# Allegro board MK60_88E6071_TEST_V10A.brd
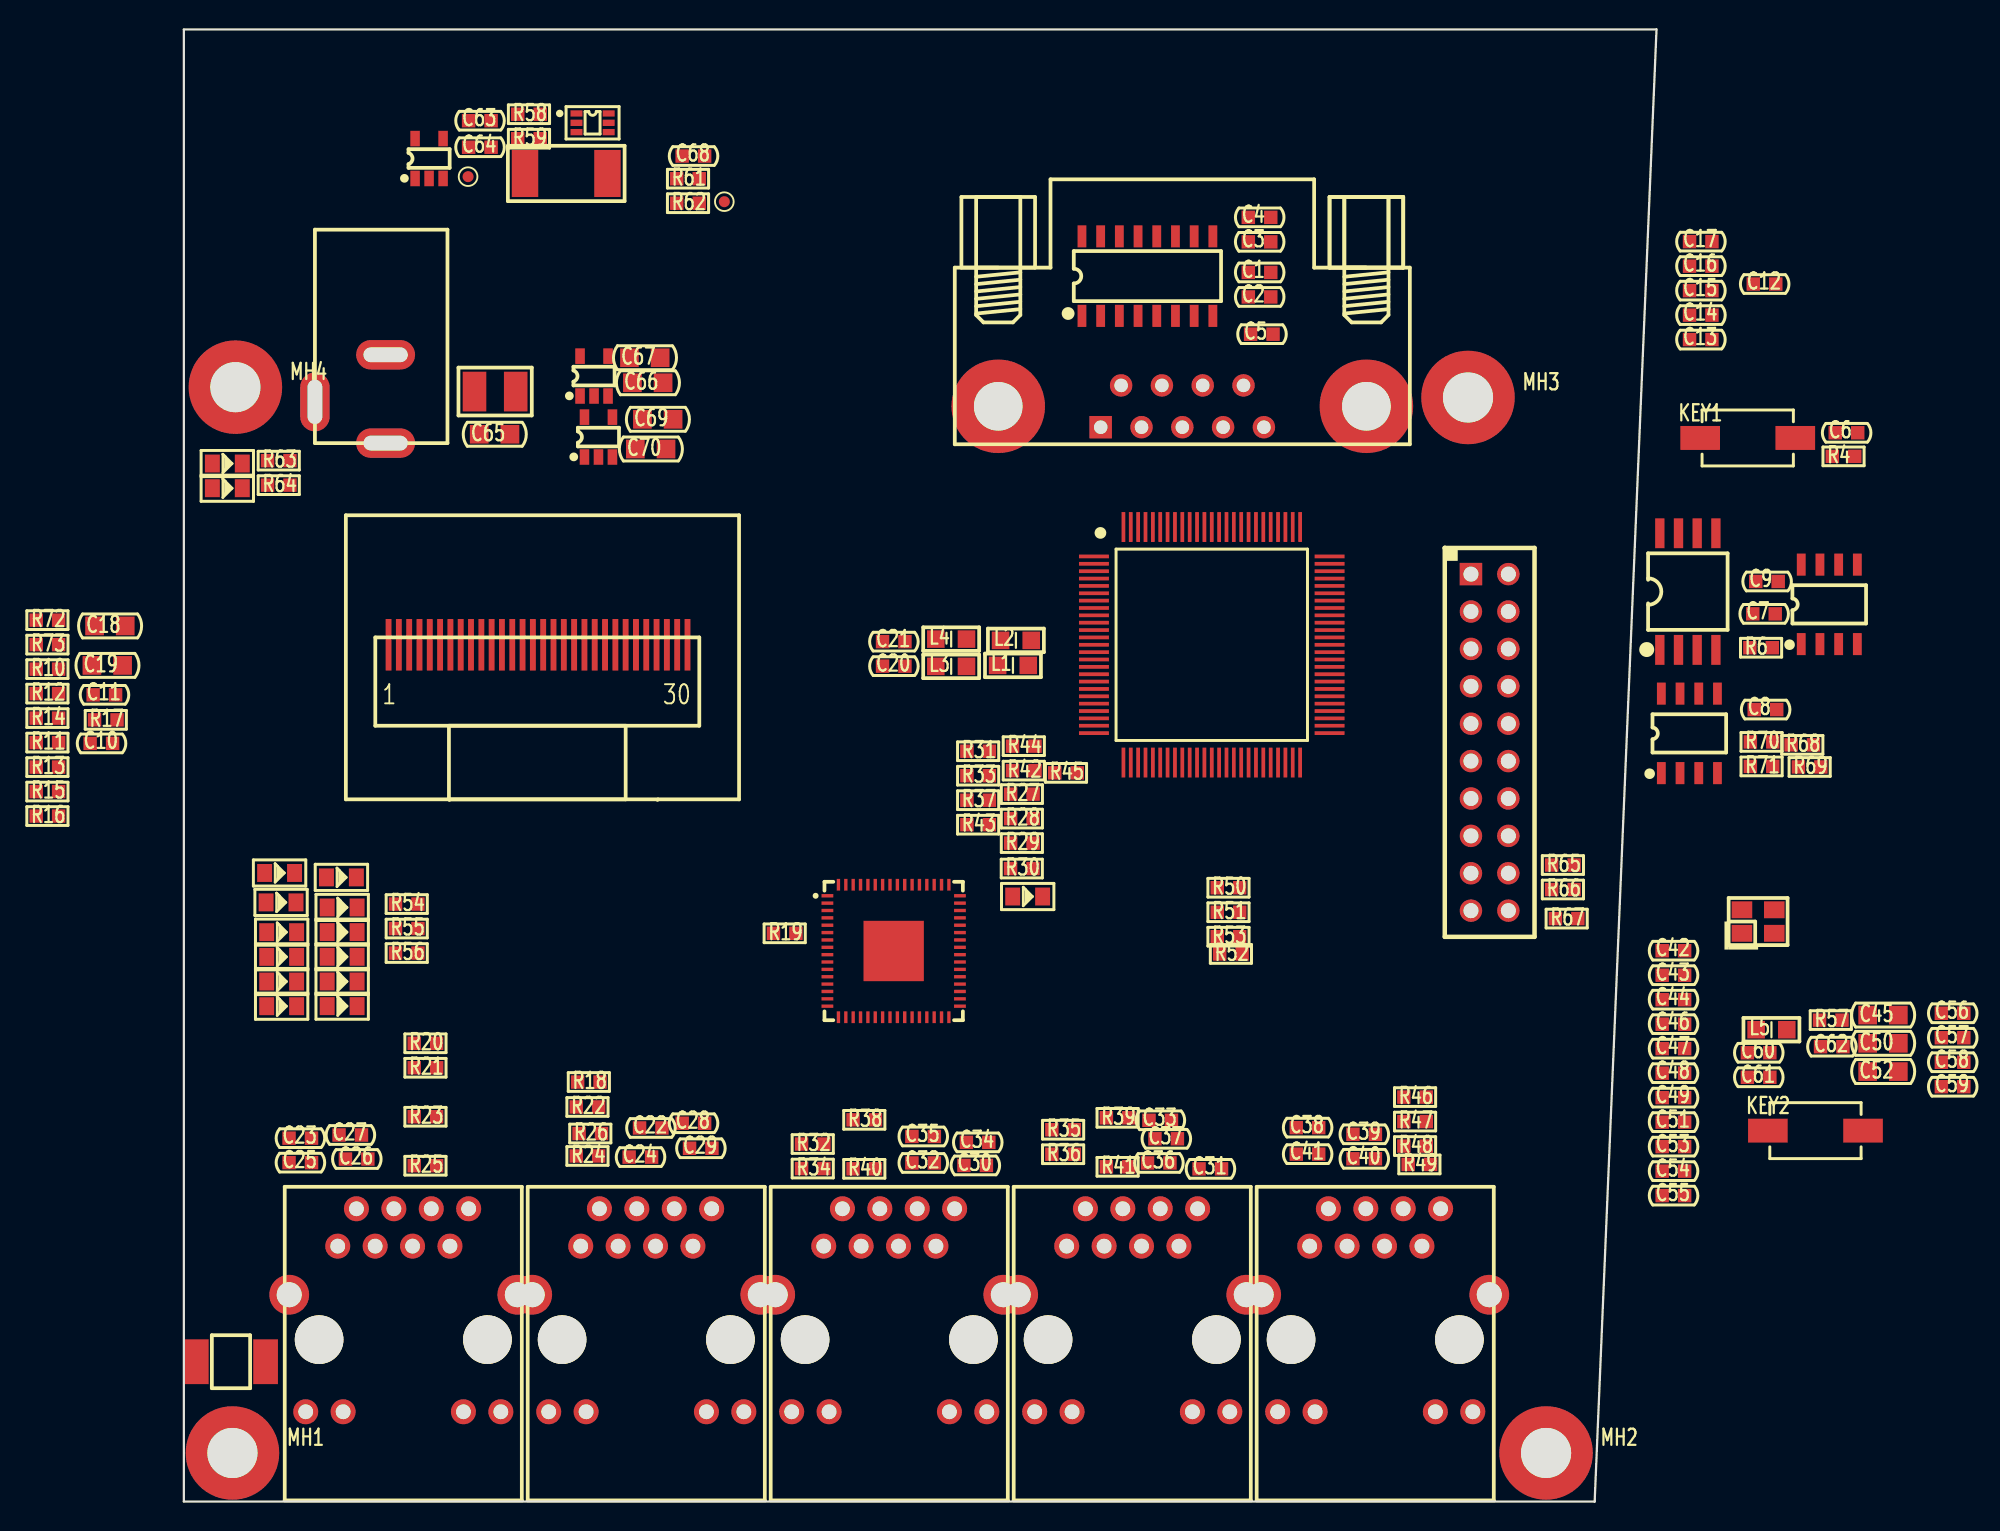
[diagram p0: board, top side]
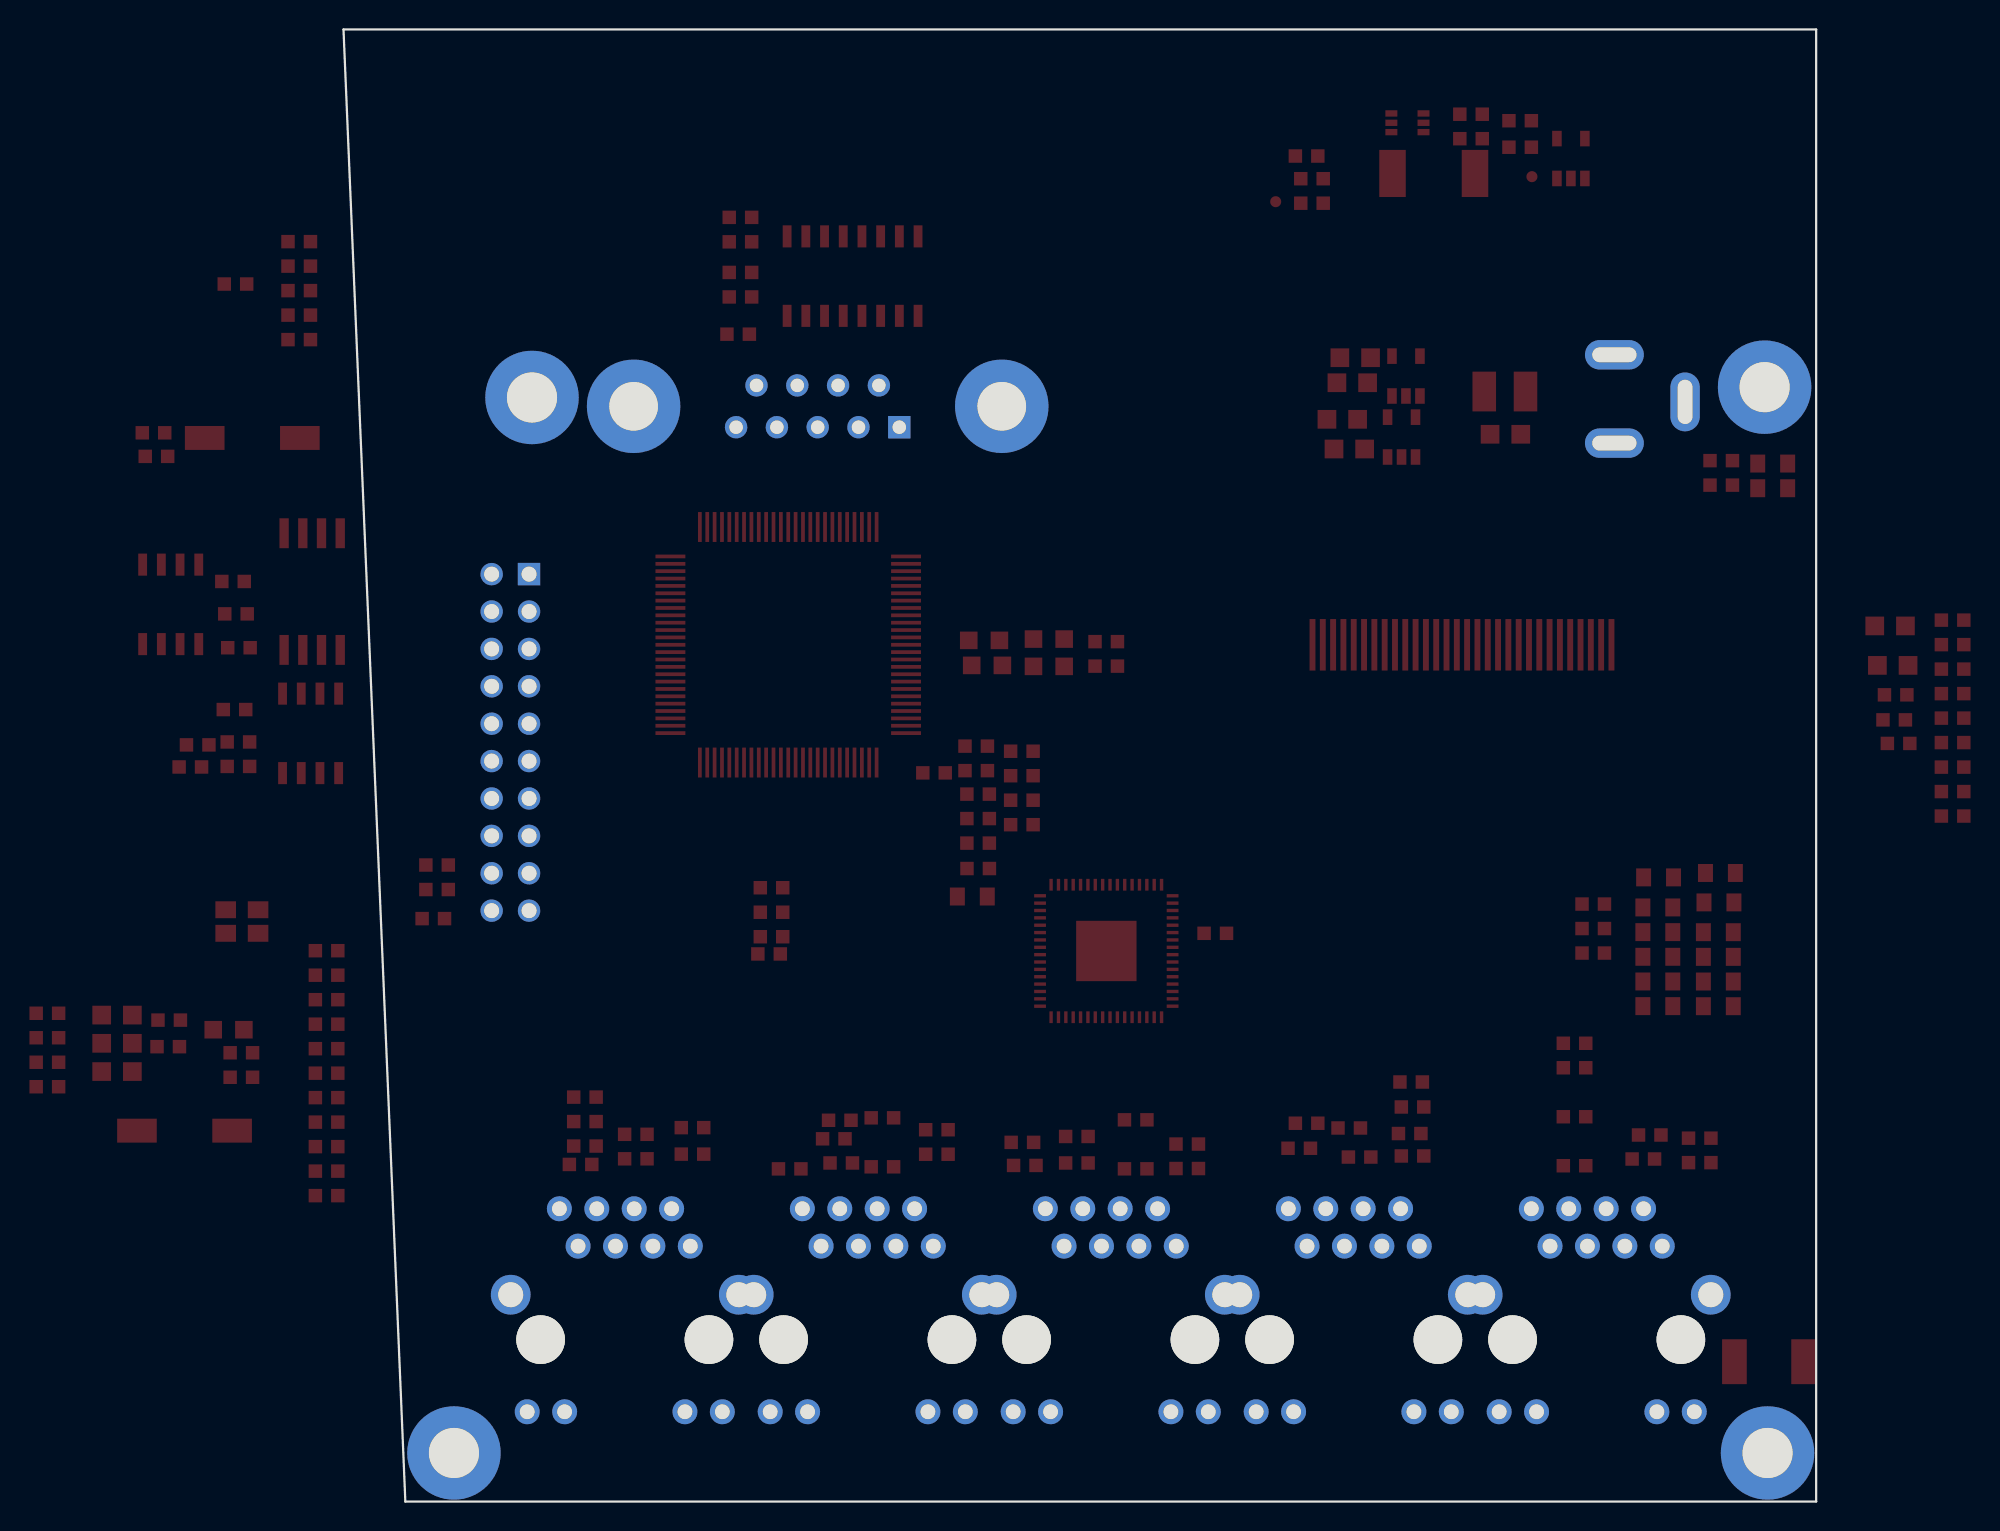
[diagram p1: board, bottom side, seen from below]

Outline 100 x 100 mm; copper layers: TOP, BOTTOM. Coordinates in mm from the lower left corner of the outline.
Outline path: 0,100 0,0 95.8,0 100,100 0,100

## Design rules (mm)
net group DP5: nets RXN0 RXN4
net group DP11: nets TXP0 TXP4
net group DP12: nets RXP0 RXP4

## Placement (name value [footprint] x y rotation side)
C1  0.1uF_50V  [CC0603]  73.04 83.49 0 top
C2  0.1uF_50V  [CC0603]  73.04 81.83 0 top
C3  0.1uF_50V  [CC0603]  73.04 85.57 0 top
C4  0.1uF_50V  [CC0603]  73.04 87.24 0 top
C5  0.1uF_50V  [CC0603]  73.2 79.3 0 top
C6  0.1uF_50V  [CC0603]  112.9 72.6 0 top
C7  0.1uF_50V  [CC0603]  107.3 60.3 0 top
C8  0.1uF_50V  [CC0603]  107.4 53.8 0 top
C9  0.1uF_50V  [CC0603]  107.5 62.5 0 top
C10  1uF_50V  [CC0603]  -5.6 51.5 0 top
C11  1uF_50V  [CC0603]  -5.4 54.8 0 top
C12  0.1uF_50V  [CC0603]  107.33 82.71 0 top
C13  0.1uF_50V  [CC0603]  103.01 78.93 0 top
C14  0.1uF_50V  [CC0603]  103.01 80.59 0 top
C15  0.1uF_50V  [CC0603]  103.01 82.26 0 top
C16  0.1uF_50V  [CC0603]  103.01 83.92 0 top
C17  0.1uF_50V  [CC0603]  103.01 85.59 0 top
C18  10uF_25V  [CC0805]  -5.02 59.48 0 top
C19  10uF_25V  [CC0805]  -5.2 56.8 0 top
C20  0.1uF_50V  [CC0603]  48.21 56.75 0 top
C21  0.1uF_50V  [CC0603]  48.21 58.41 0 top
C22  0.1uF_50V  [CC0603]  31.71 25.38 0 top
C23  0.1uF_50V  [CC0603]  7.91 24.69 0 top
C24  0.1uF_50V  [CC0603]  31 23.4 0 top
C25  0.1uF_50V  [CC0603]  7.91 23.02 0 top
C26  0.1uF_50V  [CC0603]  11.73 23.27 0 top
C27  1nF_50V  [CC0603]  11.3 24.9 0 top
C28  0.1uF_50V  [CC0603]  34.6 25.7 0 top
C29  1nF_50V  [CC0603]  35.1 24 0 top
C30  0.1uF_50V  [CC0603]  53.73 22.83 0 top
C31  0.1uF_50V  [CC0603]  69.7 22.6 0 top
C32  0.1uF_50V  [CC0603]  50.2 23 0 top
C33  0.1uF_50V  [CC0603]  66.3 25.9 0 top
C34  0.1uF_50V  [CC0603]  53.9 24.4 0 top
C35  1nF_50V  [CC0603]  50.2 24.8 0 top
C36  0.1uF_50V  [CC0603]  66.2 23 0 top
C37  1nF_50V  [CC0603]  66.71 24.64 0 top
C38  0.1uF_50V  [CC0603]  76.3 25.4 0 top
C39  0.1uF_50V  [CC0603]  80.15 24.95 0 top
C40  0.1uF_50V  [CC0603]  80.15 23.28 0 top
C41  1nF_50V  [CC0603]  76.3 23.6 0 top
C42  0.1uF_50V  [CC0603]  101.15 37.42 0 top
C43  0.1uF_50V  [CC0603]  101.15 35.76 0 top
C44  0.1uF_50V  [CC0603]  101.15 34.09 0 top
C45  10uF_25V  [CC0805]  115.38 33.05 0 top
C46  0.1uF_50V  [CC0603]  101.15 32.43 0 top
C47  0.1uF_50V  [CC0603]  101.15 30.76 0 top
C48  0.1uF_50V  [CC0603]  101.15 29.1 0 top
C49  0.1uF_50V  [CC0603]  101.15 27.44 0 top
C50  10uF_25V  [CC0805]  115.38 31.13 0 top
C51  0.1uF_50V  [CC0603]  101.15 25.77 0 top
C52  10uF_25V  [CC0805]  115.38 29.21 0 top
C53  0.1uF_50V  [CC0603]  101.15 24.11 0 top
C54  0.1uF_50V  [CC0603]  101.15 22.45 0 top
C55  0.1uF_50V  [CC0603]  101.15 20.78 0 top
C56  0.1uF_50V  [CC0603]  120.11 33.17 0 top
C57  0.1uF_50V  [CC0603]  120.11 31.51 0 top
C58  0.1uF_50V  [CC0603]  120.11 29.84 0 top
C59  0.1uF_50V  [CC0603]  120.11 28.18 0 top
C60  20pF_50V  [CC0603]  106.93 30.49 0 top
C61  20pF_50V  [CC0603]  106.93 28.82 0 top
C62  470pF_50V  [CC0603]  111.9 30.9 0 top
C63  0.1uF_50V  [CC0603]  20.1 93.8 0 top
C64  0.1uF_50V  [CC0603]  20.1 92 0 top
C65  10uF_25V  [CC0805]  21.1 72.5 0 top
C66  10uF_25V  [CC0805]  31.5 76 0 top
C67  10uF_25V  [CC0805]  31.3 77.7 0 top
C68  0.1uF_50V  [CC0603]  34.6 91.4 0 top
C69  10uF_25V  [CC0805]  32.18 73.52 0 top
C70  10uF_25V  [CC0805]  31.7 71.5 0 top
D1  LED_GREEN  [LED0805]  57.3 41.1 0 top
D2  LED_GREEN  [LED0805]  6.6 40.7 0 top
D3  LED_GREEN  [LED0805]  10.75 33.65 0 top
D4  LED_GREEN  [LED0805]  10.75 40.36 0 top
D5  LED_GREEN  [LED0805]  10.75 38.68 0 top
D6  LED_GREEN  [LED0805]  10.75 37.01 0 top
D7  LED_GREEN  [LED0805]  10.75 35.33 0 top
D8  LED_GREEN  [LED0805]  10.7 42.4 0 top
D9  LED_GREEN  [LED0805]  6.5 42.7 0 top
D10  LED_GREEN  [LED0805]  6.64 38.68 0 top
D11  LED_GREEN  [LED0805]  6.64 37 0 top
D12  LED_GREEN  [LED0805]  6.64 35.33 0 top
D13  LED_GREEN  [LED0805]  6.64 33.65 0 top
D14  LED_GREEN  [LED0805]  2.95 70.51 0 top
D15  LED_GREEN  [LED0805]  2.95 68.83 0 top
DC1  -  [DC005]  13.7 77.9 270 top
F1  SMD1210-6V2A  [SMD-1210]  21.14 75.4 0 top
FB1  FBMH4532HM132-T/NI  [L1812]  3.2 9.5 0 top
J1  -  [HEADER10X2_2R54]  87.4 63 270 top
J2  -  [DB9-F]  67.8 74.4 0 top
J3  -  [HR911105A]  14.9 11 180 top
J4  -  [HR911105A]  31.4 11 180 top
J5  -  [HR911105A]  64.4 11 180 top
J6  -  [HR911105A]  47.9 11 180 top
J7  -  [HR911105A]  80.9 11 180 top
KEY1  KEY  [KEY_SMD_2]  106.19 72.25 0 top
KEY2  KEY  [KEY_SMD_2]  110.79 25.2 0 top
L1  BEAD_BLM21PG600  [LC0805]  56.3 56.8 0 top
L2  BEAD_BLM21PG600  [LC0805]  56.5 58.5 0 top
L3  BEAD_BLM21PG600  [LC0805]  52.1 56.73 0 top
L4  BEAD_BLM21PG600  [LC0805]  52.1 58.59 0 top
L5  BEAD_BLM21PG600  [LC0805]  107.8 32.05 0 top
MH1  HOLD-M3  [HOLD250D134]  3.3 3.3 0 top
MH2  HOLD-M3  [HOLD250D134]  92.5 3.3 0 top
MH3  HOLD-M3  [HOLD250D134]  87.2 75 0 top
MH4  HOLD-M3  [HOLD250D134]  3.5 75.7 0 top
R4  10K  [RC0603]  112.7 71 0 top
R6  10K  [RC0603]  107.1 58 0 top
R10  0R/NI  [RC0603]  -9.27 56.55 0 top
R11  0R  [RC0603]  -9.27 51.56 0 top
R12  0R/NI  [RC0603]  -9.27 54.88 0 top
R13  0R  [RC0603]  -9.27 49.89 0 top
R14  0R/NI  [RC0603]  -9.27 53.22 0 top
R15  0R  [RC0603]  -9.27 48.23 0 top
R16  0R  [RC0603]  -9.27 46.56 0 top
R17  390K  [RC0603]  -5.3 53.1 0 top
R18  49.9R  [RC0603]  27.5 28.5 0 top
R19  4.99K  [RC0603]  40.8 38.6 0 top
R20  49.9R  [RC0603]  16.41 31.13 0 top
R21  49.9R  [RC0603]  16.41 29.47 0 top
R22  49.9R  [RC0603]  27.41 26.8 0 top
R23  49.9R  [RC0603]  16.41 26.14 0 top
R24  49.9R  [RC0603]  27.41 23.48 0 top
R25  49.9R  [RC0603]  16.41 22.81 0 top
R26  49.9R  [RC0603]  27.6 25 0 top
R27  20R  [RC0603]  56.91 48.06 0 top
R28  20R  [RC0603]  56.91 46.39 0 top
R29  20R  [RC0603]  56.91 44.73 0 top
R30  20R  [RC0603]  56.9 43 0 top
R31  20R  [RC0603]  53.93 50.97 0 top
R32  49.9R  [RC0603]  42.71 24.28 0 top
R33  20R  [RC0603]  53.93 49.31 0 top
R34  49.9R  [RC0603]  42.71 22.62 0 top
R35  49.9R  [RC0603]  59.71 25.26 0 top
R36  49.9R  [RC0603]  59.71 23.59 0 top
R37  20R  [RC0603]  53.93 47.64 0 top
R38  49.9R  [RC0603]  46.21 25.93 0 top
R39  49.9R  [RC0603]  63.41 26.07 0 top
R40  49.9R  [RC0603]  46.21 22.6 0 top
R41  49.9R  [RC0603]  63.41 22.74 0 top
R42  150R  [RC0603]  57.03 49.65 0 top
R43  20R  [RC0603]  53.93 45.98 0 top
R44  20R  [RC0603]  57.03 51.31 0 top
R45  10K  [RC0603]  59.9 49.5 0 top
R46  49.9R  [RC0603]  83.61 27.48 0 top
R47  49.9R  [RC0603]  83.61 25.81 0 top
R48  49.9R  [RC0603]  83.61 24.15 0 top
R49  49.9R  [RC0603]  83.9 22.9 0 top
R50  4.7K/NI  [RC0603]  70.93 41.7 0 top
R51  4.7K/NI  [RC0603]  70.93 40.03 0 top
R52  4.7K  [RC0603]  71.1 37.2 0 top
R53  4.7K/NI  [RC0603]  70.93 38.37 0 top
R54  150R  [RC0603]  15.13 40.59 0 top
R55  150R  [RC0603]  15.13 38.92 0 top
R56  150R  [RC0603]  15.13 37.26 0 top
R57  5.9K  [RC0603]  111.83 32.71 0 top
R58  10R  [RC0603]  23.43 94.24 0 top
R59  10R  [RC0603]  23.43 92.58 0 top
R60  0R47  [RC2512]  25.97 90.22 0 top
R61  110K  [RC0603]  34.23 89.86 0 top
R62  220K  [RC0603]  34.23 88.2 0 top
R63  2K  [RC0603]  6.44 70.71 0 top
R64  2K  [RC0603]  6.44 69.04 0 top
R65  10K  [RC0603]  93.64 43.24 0 top
R66  10K  [RC0603]  93.64 41.58 0 top
R67  10K  [RC0603]  93.9 39.6 0 top
R68  10K  [RC0603]  109.9 51.4 0 top
R69  0R  [RC0603]  110.4 49.9 0 top
R70  4.7K  [RC0603]  107.13 51.6 0 top
R71  4.7K  [RC0603]  107.13 49.94 0 top
R72  4.7K  [RC0603]  -9.27 59.87 0 top
R73  4.7K  [RC0603]  -9.27 58.21 0 top
TP1  TestPoint  [TP-0R75]  19.3 90 0 top
TP2  TestPoint  [TP-0R75]  36.7 88.3 0 top
U1  MAX3232ESE+  [SOIC16]  65.43 83.24 0 top
U2  MK60DN512VLL10  [LQFP-100]  69.8 58.2 0 top
U3  AT24C512C-SSHM-T/NI  [SOIC8]  102.23 52.18 0 top
U4  W25Q128FVSIG  [SOIC-8_208]  102.13 61.81 0 top
U5  TMP75AIDR  [SOIC8]  111.73 60.95 0 top
U6  -  [OLED_0R96]  11 47.7 0 top
U7  88E6071-xx-NNC2I000  [QFN-64]  48.2 37.4 270 top
U8  X322525MSB4SI  [X-4P-3R2X2R5-SMD]  106.9 39.4 0 top
U9  INA193AIDBVT  [SOT23-5]  16.65 91.23 0 top
U10  NUP4202W1T2G  [SC-88]  27.75 93.66 0 top
U11  SPX3819M5-L-3-3/TR  [SOT23-5]  27.85 76.45 0 top
U12  SPX3819M5-L-3-3/TR  [SOT23-5]  28.15 72.31 0 top

## Library data of the parts
C1-C6 C62 = CAP NP
C7-C61 C63-C70 = CAP NP_2
D1-D15 = LED_4
DC1 = DC005
F1 = FUSE
FB1 = FB
J1 = CON20_0
J2 = DB9-F_0
J3-J7 = CON_RJ45_1X8_F_RA_0
KEY1 KEY2 = SW PUSHBUTTON_0
L1-L5 = IND_BEAD_0805_600OHM_1
MH1-MH4 = Hold_1
R4 R6 R10-R73 = R_Generic
TP1 TP2 = TestPoint
U1 = ADM202_0
U2 = MK60DN512VLL10_4
U3 = TMP_0
U4 = CEIT_C5000_0
U5 = TMP75AIDR_0
U6 = OLED_0
U7 = 88E6071-xx-NNC2I000
U8 = TSX-3225
U9 = 74AHC1G08_1
U10 = nup2202w1_D_2
U11 U12 = SPX3819M5-L-1-2

## Footprints (pads in the part's own frame, mm; a bottom-side part is the same pattern mirrored in y, then rotated)
CC0603
  rect 0.914x0.914 smd: 1(-0.762,0) 2(0.762,0)
CC0805
  rect 1.27x1.27 smd: 1(-1.041,0) 2(1.041,0)
DB9-F
  rect 1.524x1.524 hole 0.914: 1(-5.54,-1.42)
  round 1.524 hole 0.914: 2(-2.77,-1.42) 3(0,-1.42) 4(2.77,-1.42) 5(5.54,-1.42) 6(-4.155,1.42) 7(-1.385,1.42) 8(1.385,1.42) 9(4.155,1.42)
  round 6.35 hole 3.302: 10(12.5,0) 11(-12.5,0)
DC005
  oval 2x4 hole 1x3: 1(6,0) 2(0,0)
  oval 4x2 hole 3x1: 3(3.2,-4.8)
HEADER10X2_2R54
  rect 1.524x1.524 hole 1.016: 1(0,0)
  round 1.524 hole 1.016: 2(0,2.54) 3(2.54,0) 4(2.54,2.54) 5(5.08,0) 6(5.08,2.54) 7(7.62,0) 8(7.62,2.54) 9(10.16,0) 10(10.16,2.54) 11(12.7,0) 12(12.7,2.54) 13(15.24,0) 14(15.24,2.54) 15(17.78,0) 16(17.78,2.54) 17(20.32,0) 18(20.32,2.54) 19(22.86,0) 20(22.86,2.54)
HOLD250D134
  round 6.35 hole 3.404: 1(0,0)
HR911105A
  round 3.3 hole 3.3 unplated: (-5.715,0) (5.715,0)
  round 1.699 hole 1.001: 1(4.45,-6.35) 2(3.18,-8.89) 3(1.91,-6.35) 4(0.64,-8.89) 5(-0.63,-6.35) 6(-1.9,-8.89) 7(-3.17,-6.35) 8(-4.44,-8.89) 9(6.625,4.9) 10(4.085,4.9) 11(-4.085,4.9) 12(-6.625,4.9)
  round 2.7 hole 1.7: 13(7.745,-3.05) 14(-7.745,-3.05)
KEY_SMD_2
  rect 2.692x1.626 smd: 1(-3.23,0) 2(3.23,0)
L1812
  rect 1.676x3.048 smd: 1(-2.349,0) 2(2.349,0)
LC0805
  rect 1.194x1.194 smd: 1(-1.041,0) 2(1.041,0)
LED0805
  rect 1.016x1.219 smd: 1(-1.016,0) 2(1.016,0)
LQFP-100
  rect 2.032x0.254 smd: 1(-8,6) 2(-8,5.5) 3(-8,5) 4(-8,4.5) 5(-8,4) 6(-8,3.5) 7(-8,3) 8(-8,2.5) 9(-8,2) 10(-8,1.5) 11(-8,1) 12(-8,0.5) 13(-8,0) 14(-8,-0.5) 15(-8,-1) 16(-8,-1.5) 17(-8,-2) 18(-8,-2.5) 19(-8,-3) 20(-8,-3.5) 21(-8,-4) 22(-8,-4.5) 23(-8,-5) 24(-8,-5.5) 25(-8,-6) 51(8,-6) 52(8,-5.5) 53(8,-5) 54(8,-4.5) 55(8,-4) 56(8,-3.5) 57(8,-3) 58(8,-2.5) 59(8,-2) 60(8,-1.5) 61(8,-1) 62(8,-0.5) 63(8,0) 64(8,0.5) 65(8,1) 66(8,1.5) 67(8,2) 68(8,2.5) 69(8,3) 70(8,3.5) 71(8,4) 72(8,4.5) 73(8,5) 74(8,5.5) 75(8,6)
  rect 0.254x2.032 smd: 26(-6,-8) 27(-5.5,-8) 28(-5,-8) 29(-4.5,-8) 30(-4,-8) 31(-3.5,-8) 32(-3,-8) 33(-2.5,-8) 34(-2,-8) 35(-1.5,-8) 36(-1,-8) 37(-0.5,-8) 38(0,-8) 39(0.5,-8) 40(1,-8) 41(1.5,-8) 42(2,-8) 43(2.5,-8) 44(3,-8) 45(3.5,-8) 46(4,-8) 47(4.5,-8) 48(5,-8) 49(5.5,-8) 50(6,-8) 76(6,8) 77(5.5,8) 78(5,8) 79(4.5,8) 80(4,8) 81(3.5,8) 82(3,8) 83(2.5,8) 84(2,8) 85(1.5,8) 86(1,8) 87(0.5,8) 88(0,8) 89(-0.5,8) 90(-1,8) 91(-1.5,8) 92(-2,8) 93(-2.5,8) 94(-3,8) 95(-3.5,8) 96(-4,8) 97(-4.5,8) 98(-5,8) 99(-5.5,8) 100(-6,8)
OLED_0R96
  rect 0.4x3.5 smd: 1(2.9,10.5) 2(3.6,10.5) 3(4.3,10.5) 4(5,10.5) 5(5.7,10.5) 6(6.4,10.5) 7(7.1,10.5) 8(7.8,10.5) 9(8.5,10.5) 10(9.2,10.5) 11(9.9,10.5) 12(10.6,10.5) 13(11.3,10.5) 14(12,10.5) 15(12.7,10.5) 16(13.4,10.5) 17(14.1,10.5) 18(14.8,10.5) 19(15.5,10.5) 20(16.2,10.5) 21(16.9,10.5) 22(17.6,10.5) 23(18.3,10.5) 24(19,10.5) 25(19.7,10.5) 26(20.4,10.5) 27(21.1,10.5) 28(21.8,10.5) 29(22.5,10.5) 30(23.2,10.5)
QFN-64
  rect 0.23x0.8 smd: 1(-3.75,-4.5) 2(-3.25,-4.5) 3(-2.75,-4.5) 4(-2.25,-4.5) 5(-1.75,-4.5) 6(-1.25,-4.5) 7(-0.75,-4.5) 8(-0.25,-4.5) 9(0.25,-4.5) 10(0.75,-4.5) 11(1.25,-4.5) 12(1.75,-4.5) 13(2.25,-4.5) 14(2.75,-4.5) 15(3.25,-4.5) 16(3.75,-4.5) 33(3.75,4.5) 34(3.25,4.5) 35(2.75,4.5) 36(2.25,4.5) 37(1.75,4.5) 38(1.25,4.5) 39(0.75,4.5) 40(0.25,4.5) 41(-0.25,4.5) 42(-0.75,4.5) 43(-1.25,4.5) 44(-1.75,4.5) 45(-2.25,4.5) 46(-2.75,4.5) 47(-3.25,4.5) 48(-3.75,4.5)
  rect 0.8x0.23 smd: 17(4.5,-3.75) 18(4.5,-3.25) 19(4.5,-2.75) 20(4.5,-2.25) 21(4.5,-1.75) 22(4.5,-1.25) 23(4.5,-0.75) 24(4.5,-0.25) 25(4.5,0.25) 26(4.5,0.75) 27(4.5,1.25) 28(4.5,1.75) 29(4.5,2.25) 30(4.5,2.75) 31(4.5,3.25) 32(4.5,3.75) 49(-4.5,3.75) 50(-4.5,3.25) 51(-4.5,2.75) 52(-4.5,2.25) 53(-4.5,1.75) 54(-4.5,1.25) 55(-4.5,0.75) 56(-4.5,0.25) 57(-4.5,-0.25) 58(-4.5,-0.75) 59(-4.5,-1.25) 60(-4.5,-1.75) 61(-4.5,-2.25) 62(-4.5,-2.75) 63(-4.5,-3.25) 64(-4.5,-3.75)
  rect 4.1x4.1 smd: 65(0,0)
RC0603
  rect 0.914x0.914 smd: 1(-0.762,0) 2(0.762,0)
RC2512
  rect 1.8x3.2 smd: 1(-2.8,0) 2(2.8,0)
SC-88
  rect 0.813x0.432 smd: 1(-1.092,0.635) 2(-1.092,0) 3(-1.092,-0.635) 4(1.092,-0.635) 5(1.092,0) 6(1.092,0.635)
SMD-1210
  rect 1.6x2.7 smd: 1(-1.4,0) 2(1.4,0)
SOIC8
  rect 0.6x1.5 smd: 1(-1.9,-2.7) 2(-0.63,-2.7) 3(0.64,-2.7) 4(1.91,-2.7) 5(1.91,2.7) 6(0.64,2.7) 7(-0.63,2.7) 8(-1.9,2.7)
SOIC16
  rect 0.6x1.5 smd: 1(-4.445,-2.7) 2(-3.175,-2.7) 3(-1.905,-2.7) 4(-0.635,-2.7) 5(0.635,-2.7) 6(1.905,-2.7) 7(3.175,-2.7) 8(4.445,-2.7) 9(4.445,2.7) 10(3.175,2.7) 11(1.905,2.7) 12(0.635,2.7) 13(-0.635,2.7) 14(-1.905,2.7) 15(-3.175,2.7) 16(-4.445,2.7)
SOIC-8_208
  rect 0.635x2.032 smd: 1(-1.905,-3.962) 2(-0.635,-3.962) 3(0.635,-3.962) 4(1.905,-3.962) 5(1.905,3.962) 6(0.635,3.962) 7(-0.635,3.962) 8(-1.905,3.962)
SOT23-5
  rect 0.65x1.06 smd: 1(-0.95,-1.354) 2(0,-1.354) 3(0.95,-1.354) 4(0.95,1.354) 5(-0.95,1.354)
TP-0R75
  round 0.75 smd: 1(0,0)
X-4P-3R2X2R5-SMD
  rect 1.4x1.15 smd: 1(-1.1,-0.8) 2(1.1,-0.8) 3(1.1,0.8) 4(-1.1,0.8)

## Nets
GND: C2.1 C3.1 C4.1 C6.2 C7.1 C8.1 C9.2 C12.1 C13.1 C14.1 C15.1 C16.1 C17.1 C18.2 C19.2 C22.2 C23.2 C24.2 C25.2 C26.1 C27.1 C28.1 C29.1 C30.2 C31.2 C32.2 C33.2 C34.1 C35.1 C36.1 C37.1 C38.2 C39.2 C40.1 C41.1 C42.1 C43.1 C44.1 C45.1 C46.1 C47.1 C48.1 C49.1 C50.1 C51.1 C52.1 C53.1 C54.1 C55.1 C56.1 C57.1 C58.1 C59.1 C60.1 C61.1 C62.2 C63.2 C65.2 C66.2 C67.2 C68.2 C69.2 C70.2 D14.2(CATHODE) D15.2(CATHODE) DC1.2 DC1.3 FB1.2 J1.4 J1.6 J1.8 J1.10 J1.12 J1.14 J1.16 J1.18 J1.20 J2.5 KEY1.2 KEY2.2 L3.1(A) MH1.1 MH2.1 MH3.1 MH4.1 R13.1 R14.1 R15.1 R17.1 R19.1 R50.2 R51.2 R52.2 R53.2 R62.1 R69.1 U1.15(GND) U2.9(VSS_1) U2.41(VSS_2) U2.49(VSS_3) U2.60(VSS_4) U2.74(VSS_5) U2.88(VSS_6) U3.1(A0) U3.2(A1) U3.4(GND) U4.4(GND) U5.4(GND) U5.5(A2) U5.6(A1) U5.7(A0) U6.1(NC(GND)_1) U6.7(NC) U6.8(VSS) U6.13(CS#) U6.16(R/W#) U6.17(E/RD#) U6.21(D3) U6.22(D4) U6.23(D5) U6.24(D6) U6.25(D7) U6.29(VLSS) U6.30(NC(GND)_2) U7.38(VSS) U7.65(GND) U8.2(GND1) U8.4(GND2) U9.2(GND) U10.2 U11.2(GND) U12.2(GND)
GND_EARTH: FB1.1 J2.10 J2.11 J3.8 J3.13(EG2) J3.14(EG1) J4.8 J4.13(EG2) J4.14(EG1) J5.8 J5.13(EG2) J5.14(EG1) J6.8 J6.13(EG2) J6.14(EG1) J7.8 J7.13(EG2) J7.14(EG1)
VCC_3.3V: C4.2 C7.2 C8.2 C9.1 C12.2 C13.2 C14.2 C15.2 C16.2 C17.2 C18.1 C63.1 C70.1 J1.1 J1.2 L1.1(A) R4.1 R6.1 R10.2 R11.2 R12.2 R64.2 R65.1 R66.1 R67.1 R68.2 R70.1 R71.1 R72.1 R73.1 U1.16(VCC) U2.8(VDD_1) U2.40(VDD_2) U2.48(VDD_3) U2.61(VDD_4) U2.75(VDD_5) U2.89(VDD_6) U3.8(VCC) U4.8(VCC) U5.8(V+) U6.6(VBAT) U6.9(VDD) U6.28(VCC) U9.5(V+) U10.5 U12.5(VOUT)
VCC_3.3V_OUT: C67.1 R58.2 R60.2 R61.2 R63.2 U11.5(VOUT)
VCC_3.3V_SWITCH: C42.2 C43.2 C44.2 C45.2 R42.2 R45.2 R57.1 R59.2 R60.1 U7.33(VDD33) U7.48(P5_VDDO) U7.62(EE_VDDO)
VCC_5V: C65.1 DC1.1 F1.1
VDDA3V3: C20.1 L1.2(B) L2.1(A) U2.22(VDDA)
VSSA: C20.2 L3.2(B) L4.1(A) U2.25(VSSA)
BS0: R10.1 R13.2 U6.10(BS0)
BS1: R11.1 R14.2 U6.11(BS1)
BS2: R12.1 R15.2 U6.12(BS2)
C0_LED: D8.1(ANODE) D10.1(ANODE) D12.1(ANODE) U7.61(EE_DIN/C0_LED/EEE)
C1_LED: D9.1(ANODE) D11.1(ANODE) D13.1(ANODE) U7.63(EE_CLK/C1_LED/FLOW)
C2_LED: D2.1(ANODE) D4.1(ANODE) D6.1(ANODE) U7.64(EE_CS/C2_LED/EE_WE)
C3_LED: D3.1(ANODE) D5.1(ANODE) D7.1(ANODE) U7.1(EE_DOUT/C3_LED)
CLK_50M: R31.2 U2.50(PTA18)
D/C#: U2.80(PTC8) U6.15(D/C#)
E6071_AVDD_1.8V: C53.2 C54.2 C55.2 C56.2 C57.2 C58.2 C59.2 L5.2(B) U7.5(AVDD) U7.9(P0_AVDD) U7.14(P1_AVDD) U7.20(P2_AVDD) U7.25(P3_AVDD) U7.30(P4_AVDD)
E6071_CT_1.8V: C51.2 C52.2 L5.1(A) U7.34(VDD18(OUT)) U7.35(VDD18(IN))
E6071_VDD_CORE_1.2V: C46.2 C47.2 C48.2 C49.2 C50.2 U7.2(VDD_CORE_1) U7.17(VDD_CORE_2) U7.36(VDD_CORE(OUT&IN)) U7.57(VDD_CORE_3)
E6701_CT_1.8V: C26.2 C27.2 C28.2 C29.2 C34.2 C35.2 C36.2 C37.2 C40.2 C41.2 J3.4 J3.5 J4.4 J4.5 J5.4 J5.5 J6.4 J6.5 J7.4 J7.5
I2C0_PROT: R68.1 U2.57(PTB9) U3.7(WP)
I2C0_SCLK: R71.2 U2.55(PTB2) U3.6(SCL) U5.2(SCL)
I2C0_SDATA: R70.2 U2.56(PTB3) U3.5(SDA) U5.1(SDA)
I2C1_SCL: R72.2 U2.82(PTC10) U6.18(D0)
I2C1_SDA: R16.1 R73.2 U2.83(PTC11/LLWU_P11) U6.19(D1)
INTN: D1.2(CATHODE) U7.41(INTN)
JTAG_TCLK: J1.9 U2.34(PTA0)
JTAG_TDI: J1.5 R65.2 U2.35(PTA1)
JTAG_TDO: J1.13 R67.2 U2.36(PTA2)
JTAG_TMS: J1.7 R66.2 U2.37(PTA3)
MDC: R44.1 U7.39(MDC_CPU)
MDIO: R43.1 R45.1 U7.40(MDIO_CPU)
P5_ID0: R28.1 U7.55(P5_IND0/P5_ID0)
P5_ID1: R29.1 U7.54(P5_IND1/P5_ID1)
P5_INDV: R27.1 U7.56(P5_INDV/P5_ICTL)
P5_MODE0: R33.1 R50.1 U7.47(P5_OUTD0/P5_OD0/P5_MODE0)
P5_MODE1: R37.1 R51.1 U7.46(P5_OUTD1/P5_OD1/P5_MODE1)
P5_MODE2: R52.1 U7.45(P5_OUTD2/P6_OD0/P5_MDDE2)
P5_MODE3: R53.1 U7.44(P5_OUTD3/P6_OD1/P5_MODE3)
P5_OUTCLK: R31.1 U7.49(P5_OUTCLK/P5_REFCLK)
P5_OUTDV: R30.1 U7.50(P5_OUTEN/P5_OCTL/P5_SEL)
R0_LED: R56.1 U7.58(R0_LED/ADDR4)
R1_LED: R55.1 U7.59(R1_LED/NO_CPU)
R2_LED: R54.1 U7.60(R2_LED)
RES#: U2.81(PTC9) U6.14(RES#)
RESETN: C62.1 KEY2.1 R57.2 U7.37(RESETN)
RMII0_CRS_DV: R30.2 U2.44(PTA14)
RMII0_MDC: R44.2 U2.54(PTB1)
RMII0_MDIO: R43.2 U2.53(PTB0/LLWU_P5)
RMII0_RXD0: R33.2 U2.43(PTA13/LLWU_P4)
RMII0_RXD1: R37.2 U2.42(PTA12)
RMII0_TXD0: R28.2 U2.46(PTA16)
RMII0_TXD1: R29.2 U2.47(PTA17)
RMII0_TXEN: R27.2 U2.45(PTA15)
RXN0: J3.6(RXN1) R25.2 U7.8(P0_RXN)
RXN1: J4.6(RXN1) R26.2 U7.15(P1_RXN)
RXN2: J6.6(RXN1) R40.2 U7.19(P2_RXN)
RXN3: J5.6(RXN1) R41.2 U7.26(P3_RXN)
RXN4: J7.6(RXN1) R49.2 U7.29(P4_RXN)
RXP0: J3.3(RXP1) R23.2 U7.7(P0_RXP)
RXP1: J4.3(RXP1) R24.2 U7.16(P1_RXP)
RXP2: J6.3(RXP1) R38.2 U7.18(P2_RXP)
RXP3: J5.3(RXP1) R39.2 U7.27(P3_RXP)
RXP4: J7.3(RXP1) R48.2 U7.28(P4_RXP)
SYS_RESET#: C6.1 J1.15 KEY1.1 R4.2 U2.52(RESET_B)
TXN0: J3.2(TXN1) R21.2 U7.11(P0_TXN)
TXN1: J4.2(TXN1) R22.2 U7.12(P1_TXN)
TXN2: J6.2(TXN1) R34.2 U7.22(P2_TXN)
TXN3: J5.2(TXN1) R36.2 U7.23(P3_TXN)
TXN4: J7.2(TXN1) R47.2 U7.32(P4_TXN)
TXP0: J3.1(TXP1) R20.2 U7.10(P0_TXP)
TXP1: J4.1(TXP1) R18.2 U7.13(P1_TXP)
TXP2: J6.1(TXP1) R32.2 U7.21(P2_TXP)
TXP3: J5.1(TXP1) R35.2 U7.24(P3_TXP)
TXP4: J7.1(TXP1) R46.2 U7.31(P4_TXP)
UART3_RX: U1.12(ROUT1) U2.6(PTE5)
UART3_TX: U1.11(TIN1) U2.5(PTE4/LLWU_P2)
VCOMH: C19.1 U6.27(VCOMH)
VREFH: C21.1 L2.2(B) U2.23(VREFH)
VREFL: C21.2 L4.2(B) U2.24(VREFL)
W25B_CLK: U2.59(PTB11) U4.6(CLK)
W25B_CS#: R6.2 U2.58(PTB10) U4.1(C\S\)
W25B_DI: U2.63(PTB17) U4.5(DI)
W25B_DO: U2.62(PTB16) U4.2(DO)
W25B_HOLD#: U2.64(PTB18) U4.7(H\O\L\D\)
W25B_WP#: U2.65(PTB19) U4.3(W\P\)
WORK_CURRENT: TP1.1 U2.14(ADC0_DP1) U9.1(OUT) U10.1 U10.6
WORK_VOLTAGE: C68.1 R61.1 R62.2 TP2.1 U2.16(ADC1_DP1) U10.3 U10.4
XTAL_IN: C61.2 U7.3(XTAL_IN) U8.3(OUT2)
XTAL_OUT: C60.2 U7.4(XTAL_OUT) U8.1(OUT1)
N11720869: R69.2 U3.3(A2)
N16836550: R19.2 U7.6(IREF)
N16838678: D6.2(CATHODE) D7.2(CATHODE) D12.2(CATHODE) D13.2(CATHODE) R54.2
N16838681: D4.2(CATHODE) D5.2(CATHODE) D10.2(CATHODE) D11.2(CATHODE) R55.2
N16838688: D2.2(CATHODE) D3.2(CATHODE) D8.2(CATHODE) D9.2(CATHODE) R56.2
N16857523: C23.1 R20.1 R21.1
N16857564: C25.1 R23.1 R25.1
N16859623: C24.1 R18.1 R22.1
N16859644: C22.1 R24.1 R26.1
N16860087: C30.1 R32.1 R34.1
N16860108: C32.1 R38.1 R40.1
N16860576: C31.1 R35.1 R36.1
N16860597: C33.1 R39.1 R41.1
N16861090: C38.1 R46.1 R47.1
N16861111: C39.1 R48.1 R49.1
N16862095: C64.1 R59.1 U9.4(VIN-)
N16862099: C64.2 R58.1 U9.3(VIN+)
N16864237: C1.1 U1.1(C1+)
N16864239: C5.2 U1.5(C2-)
N16864245: C5.1 U1.4(C2+)
N16864247: C1.2 U1.3(C1-)
N16864249: J2.3 U1.13(RIN1)
N16864255: J2.2 U1.14(TOUT1)
N16864267: C3.2 U1.6(V-)
N16865777: C66.1 C69.1 F1.2 U11.1(VIN) U11.3(EN) U12.1(VIN) U12.3(EN)
N16866521: D14.1(ANODE) R63.1
N16866539: D15.1(ANODE) R64.1
N16868433: C10.2 U6.2(C2P)
N16868440: C10.1 U6.3(C2N)
N16868466: C11.2 U6.5(C1N)
N16868469: C11.1 U6.4(C1P)
N16869084: R17.2 U6.26(IREF)
N16877771: R16.2 U6.20(D2)
N168368250: D1.1(ANODE) R42.1
N168642928: C2.2 U1.2(V+)

Pads without a net: J1 3 11 17 19; J2 1 4 6 7 8 9; J3 7 9 10 11 12; J4 7 9 10 11 12; J5 7 9 10 11 12; J6 7 9 10 11 12; J7 7 9 10 11 12; U1 7 8 9 10; U2 1 2 3 4 7 10 11 12 13 15 17 18 19 20 21 26 27 28 29 30 31 32 33 38 39 51 66 67 68 69 70 71 72 73 76 77 78 79 84 85 86 87 90 91 92 93 94 95 96 97 98 99 100; U5 3; U7 42 43 51 52 53; U11 4; U12 4
